# Altium PCB PCB1.PcbDoc
Units mm, origin at the board's own origin, x right, y up, seen from the top; angles counter-clockwise.
Board outline 19 x 53.5 mm, 2 copper layers (Top Layer, Bottom Layer), stack 1.569 mm thick; 20 components, 8 nets, 59 pads, 7 vias.
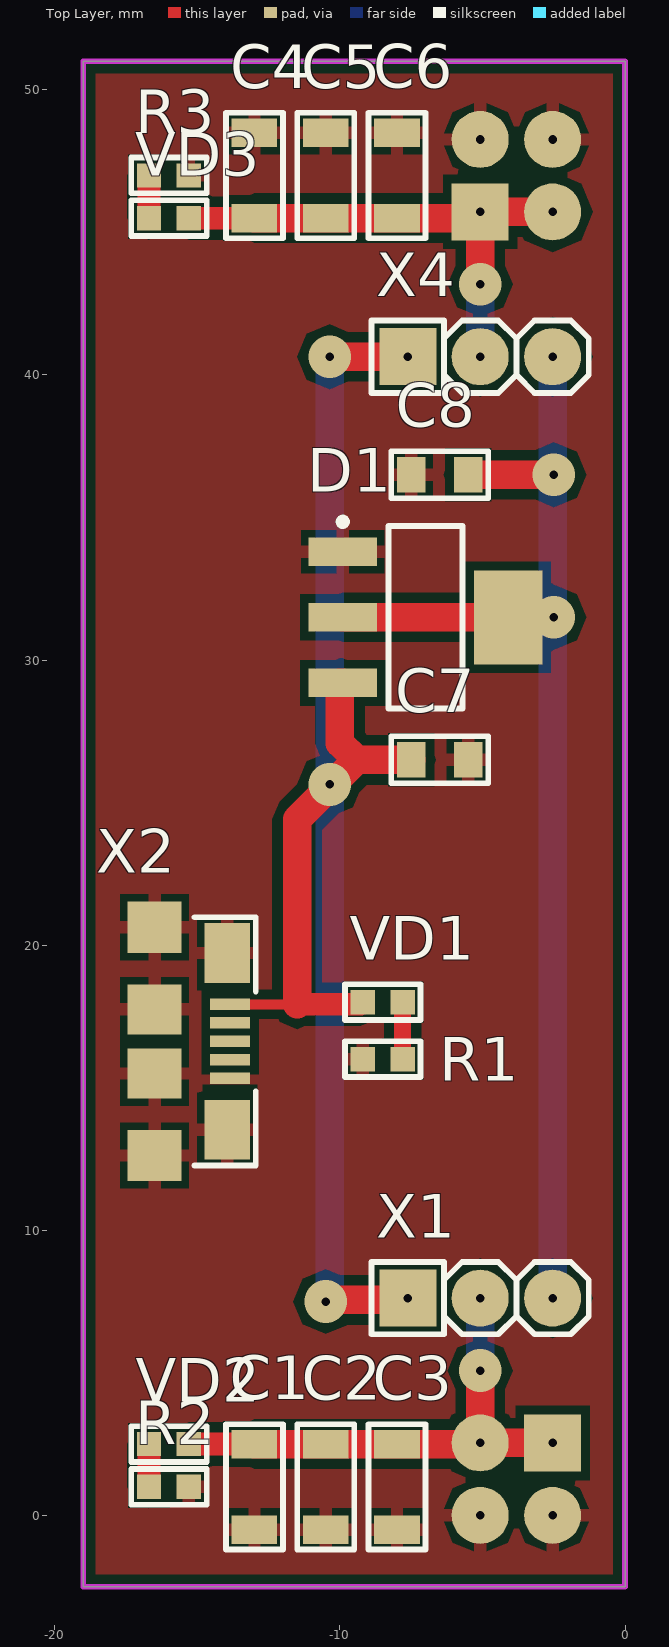
[diagram p0: Top Layer view]
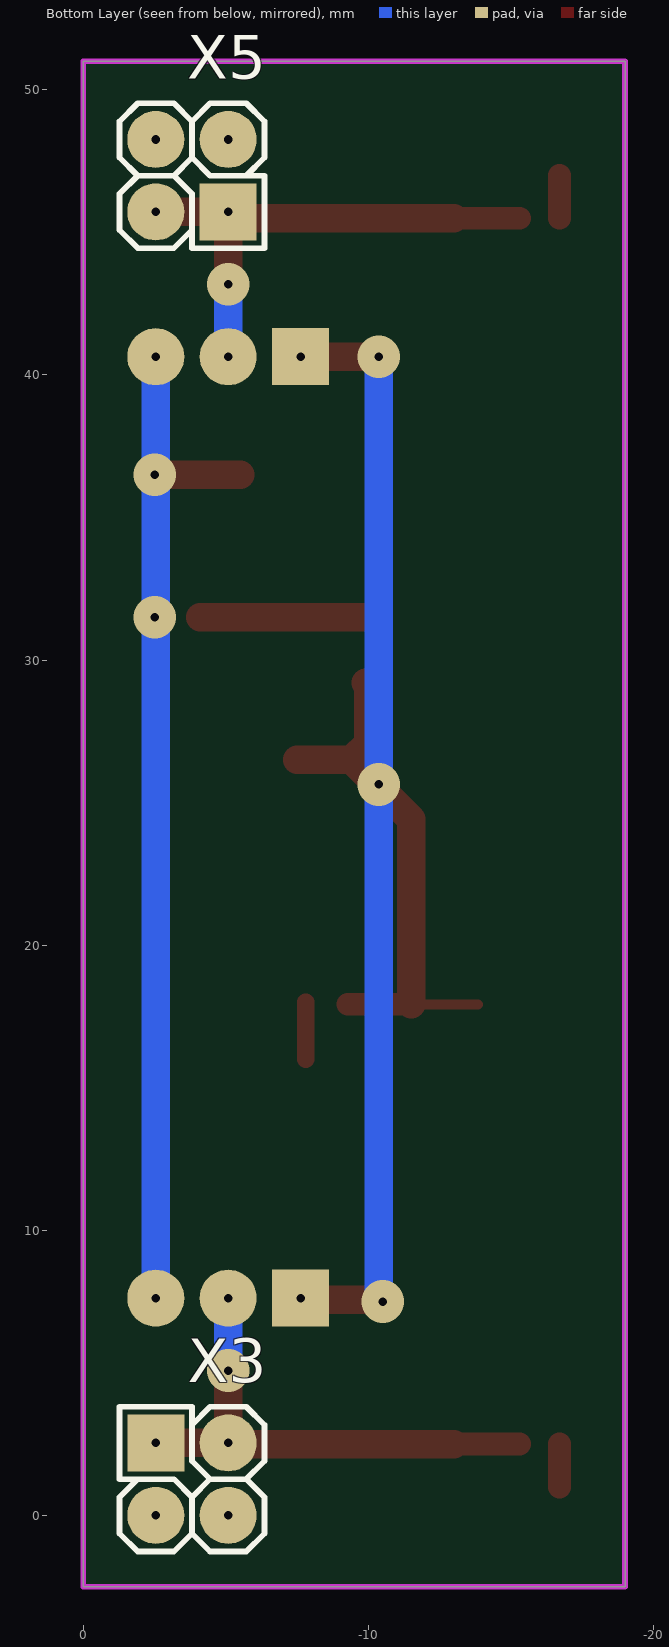
[diagram p1: Bottom Layer view, seen from below]
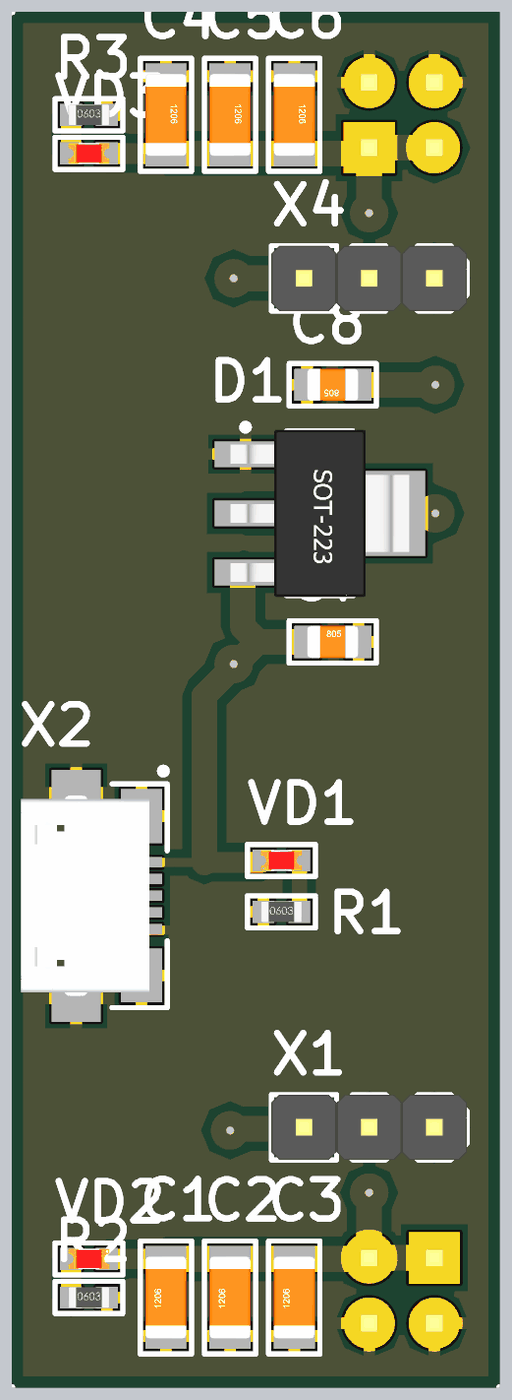
[diagram p2: 3D render of the assembled board from above, using the file's embedded part models]

## Layer stack, top to bottom
Top Solder: solder mask 0.0254, SM-001, Dk 4
Top Layer: signal copper 0.035
Dielectric 1: core 1.4986, Core-043, Dk 4.3
Bottom Layer: signal copper 0.035
Bottom Solder: solder mask 0.0254, SM-001, Dk 4

## Board outline
-19,-2.5 -19,51 0,51 0,-2.5

## Design rules (kind name [scope] priority, off if disabled: settings)
Clearance [All] p1: gap=0.1 ignorepadtopadclearanceinfootprint=TRUE except(0: Arc-Hole Track-Hole SMDPad-Hole THPad-Hole Via-Hole Fill-Hole Poly-Hole Region-Hole Text-Hole; 0.3: Arc-Poly Track-Poly SMDPad-Poly THPad-Poly Via-Poly Fill-Poly Poly-Poly)
PolygonConnect [All] p1: connectstyle=Relief reliefconductorwidth=0.45 reliefentries=4 polygonreliefangle="90 Angle" airgapwidth=0.254
RoutingVias [All] p1: holewidth=0.711 width=1.27 viastyle="Through Hole" minholewidth=0.711 minwidth=1.27 maxholewidth=0.711 maxwidth=1.27
SolderMaskExpansion [All] p1: expansion=0.102 istentingtop=FALSE
Width [All] p1: maxlimit=5 minlimit=0.1 preferedwidth=0.254
30 further rules are at their usual default settings.

## Components (designator, comment, footprint, x,y, rotation, side; value= is the part's Value field where it differs from the comment)
C1 "Ceramic capacitor, 10μF, X7R, ±10%, 50V, 1206, -55...+125°C" "CAP: 1206" -13,1 r90 top value=10μF
C2 "Ceramic capacitor, 10μF, X7R, ±10%, 50V, 1206, -55...+125°C" "CAP: 1206" -10.5,1 r90 top value=10μF
C3 "Ceramic capacitor, 10μF, X7R, ±10%, 50V, 1206, -55...+125°C" "CAP: 1206" -8,1 r90 top value=10μF
C4 "Ceramic capacitor, 10μF, X7R, ±10%, 50V, 1206, -55...+125°C" "CAP: 1206" -13,47 r270 top value=10μF
C5 "Ceramic capacitor, 10μF, X7R, ±10%, 50V, 1206, -55...+125°C" "CAP: 1206" -10.5,47 r270 top value=10μF
C6 "Ceramic capacitor, 10μF, X7R, ±10%, 50V, 1206, -55...+125°C" "CAP: 1206" -8,47 r270 top value=10μF
C7 "Ceramic capacitor, 0.1μF, X7R, ±10%, 16V, 0805, -55...+125°C" "CAP: 0805" -6.5,26.5 r0 top value=0.1μF
C8 "Ceramic capacitor, 0.1μF, X7R, ±10%, 16V, 0805, -55...+125°C" "CAP: 0805" -6.5,36.5 r180 top value=0.1μF
D1 "Linear voltage regulator, input 3.9...18V, 0.6V, output 3.3V, 1.2A, -40...+85°C, SOT223" SOT223 -7,31.5 r0 top
R1 "Resistor film, 100R, ±5%, 0603, 0.1W, -55...+125°C" "RES: 0603" -8.5,16 r0 top value=100R
R2 "Resistor film, 100R, ±5%, 0603, 0.1W, -55...+125°C" "RES: 0603" -16,1 r0 top value=100R
R3 "Resistor film, 100R, ±5%, 0603, 0.1W, -55...+125°C" "RES: 0603" -16,47 r0 top value=100R
VD1 "LED, Green, *, *, *, -55...+150°C" "LED: 0603R" -8.5,18 r0 top
VD2 "LED, Green, *, *, *, -55...+150°C" "LED: 0603R" -16,2.5 r180 top
VD3 "LED, Green, *, *, *, -55...+150°C" "LED: 0603R" -16,45.5 r180 top
X1 "Connector, 3pin, 2.54mm, 500VAC, 3A" "CON: PLS-3" -5.08,7.62 r0 top
X2 "USB micro B" "CON: USB micro-A (ZX62-B-5PA)" -13.85,16.625 r270 top
X3 "Connector, 6pin, 2.54mm, 500VAC, 3A" "CON: PLD-4" -3.81,1.27 r270 bottom
X4 "Connector, 3pin, 2.54mm, 500VAC, 3A" "CON: PLS-3" -5.08,40.64 r0 top
X5 "Connector, 6pin, 2.54mm, 500VAC, 3A" "CON: PLD-4" -3.81,46.99 r90 bottom

## Footprints (in the part's own frame and the unit in brackets; to place one, negate y for a bottom-side part, rotate by r counter-clockwise, add the part's x,y. Pads: shape width x height; smd on the part's side, far side on the other; paste and mask are expansions set on the pad)
"CAP: 0805" [mm]
  rect 1x1.25 smd: 1(-1,0) 2(1,0)
  silkscreen extent -1.7,-0.82 1.7,0.82, body extent -1,-0.62 1,0.63, height 0.78
"CAP: 1206" [mm]
  rect 1x1.6 smd: 1(-1.5,0) 2(1.5,0)
  silkscreen extent -2.2,-1 2.2,1, body extent -1.6,-0.8 1.6,0.8, height 1
"CON: PLD-4" [mm]
  rect 2x2 hole 0.3: 1(-1.27,-1.27)
  round 2 hole 0.3: 2(-1.27,1.27) 3(1.27,-1.27) 4(1.27,1.27)
  silkscreen extent -2.54,-2.54 2.54,2.54, body extent -2.59,-2.55 2.49,2.53, height 8.54
"CON: PLS-3" [mm]
  rect 2x2 hole 0.3: 1(-2.54,0)
  round 2 hole 0.3: 2(0,0) 3(2.54,0)
  silkscreen extent -3.81,-1.27 3.81,1.27, body extent -3.81,-1.27 3.81,1.27, height 8.54
"CON: USB micro-A (ZX62-B-5PA)" [mm]
  rect 1.8x1.9 smd: 0(-4,-2.65) 0(4,-2.65)
  rect 2.1x1.6 smd: 0(-3.1,-0.1) 0(3.1,-0.1)
  rect 1.75x1.9 smd: 0(-1.125,-2.65) 0(1.125,-2.65)
  rect 0.4x1.4 smd: 1(-1.3,0) 2(-0.65,0) 3(0,0) 4(0.65,0) 5(1.3,0)
  round 0.5 on Top Overlay: ""(-4.85,0.75)
  silkscreen extent -4.35,-1.25 4.35,0.9, body extent -3.9,-4.8 3.9,0.2, height 2.68
"LED: 0603R" [mm]
  rect 0.85x0.85 smd: 1(-0.7,0) 2(0.7,0)
  silkscreen extent -1.33,-0.63 1.33,0.63, body extent -0.8,-0.4 0.8,0.4, height 0.6
"RES: 0603" [mm]
  rect 0.85x0.85 smd: 1(-0.7,0) 2(0.7,0)
  silkscreen extent -1.33,-0.63 1.33,0.63, body extent -0.8,-0.4 0.8,0.4, height 0.44
SOT223 [mm] "SOT223, 4-Leads, Body 6,50x7,00mm (avg), Pitch 2,30mm, IPC Medium Density"
  rect 2.4x1 smd: 1(-2.9,2.3) 2(-2.9,0) 3(-2.9,-2.3)
  rect 2.4x3.3 smd: 4(2.9,0)
  round 0.5 on Mech1: ""(-3,2.7)
  silkscreen extent -3.02,-3.2 1.3,3.47, body extent -3.48,-3.25 3.48,3.25, height 1.65

## Part data
C1 C2 C3 C4 C5 C6: library part Ceramic_1206, Manufacturer=Yageo, Package=1206, PartNumber=CC1206KRX7R9BB104, Temperature=-55...+125°C, Tolerance=±10%, TypeCapacitor="Ceramic capacitor", TypeDielectric=X7R, Voltage=50V, HelpURL=https://www.digikey.com/product-detail/en/yageo/CC1206KRX7R9BB104/311-1179-1-ND/303089, ValueManufacturerPartNumber="Ceramic capacitor, 10μF, X7R, ±10%, 50V, 1206, -55...+125°C"
C7 C8: library part Ceramic_0805, Manufacturer=Yageo, Package=0805, PartNumber=CC0805KRX7R7BB104, Temperature=-55...+125°C, Tolerance=±10%, TypeCapacitor="Ceramic capacitor", TypeDielectric=X7R, Voltage=16V, HelpURL=https://www.digikey.com/product-detail/en/yageo/CC0805KRX7R7BB104/311-1142-1-ND/303052, ValueManufacturerPartNumber="Ceramic capacitor, 0.1μF, X7R, ±10%, 16V, 0805, -55...+125°C"
D1: library part LDL1117S33R, "Linear voltage regulator", CurrentOutput=1.2A, Manufacturer=STMicroelectronics, Package=SOT223, Temperature=-40...+85°C, VoltageInput="input 3.9...18V", VoltageOutput="output 3.3V", ComponentType="Linear voltage regulator", HelpURL=https://www.digikey.com/product-detail/en/stmicroelectronics/LDL1117S33R/497-17239-1-ND/7102079, MaxDropout=0.6V, PartNumber=LDL1117S33R, ValueManufacturerPartNumber="Linear voltage regulator, input 3.9...18V, 0.6V, output 3.3V, 1.2A, -40...+85°C, SOT223"
R1 R2 R3: library part Resistor_0603, Manufacturer=Yageo, Package=0603, PartNumber=RC0603JR-07100RL, Power=0.1W, Temperature=-55...+125°C, Tolerance=±5%, TypeResistor="Resistor film", HelpURL=https://www.digikey.com/product-detail/en/yageo/RC0603JR-07100RL/311-100GRCT-ND/729644, ValueManufacturerPartNumber="Resistor film, 100R, ±5%, 0603, 0.1W, -55...+125°C"
VD1 VD2 VD3: library part LED_single, Color=GREEN, ColorParameter=Green, Temperature=-55...+150°C, TypeDiode=LED, ValueManufacturerPartNumber="LED, Green, *, *, *, -55...+150°C"
X1 X4: library part PLS-3, CurrentMax=3A, Manufacturer=Connfly, VoltageMax=500VAC, CommentText="\"Разъем\"", HelpURL=https://www.chipdip.ru/product/pls-3, Multichannel=3pin, PartNumber=PLS-3, Pitch=2.54mm, TypeConnector=Connector, ValueManufacturerPartNumber="Connector, 3pin, 2.54mm, 500VAC, 3A"
X2: library part Connector_USB_micro_B, Manufacturer="Hirose Electric", PartNumber=ZX62-B-5PA, CommentText="\"USB\"", HelpURL=https://www.digikey.com/product-detail/en/hirose-electric-co-ltd/ZX62-B-5PA/H11579CT-ND/1851090, TypeConnector="USB micro B", ValueManufacturerPartNumber="USB micro B"
X3 X5: library part PLD-4, CurrentMax=3A, Manufacturer=Connfly, VoltageMax=500VAC, CommentText="\"Разъем\"", HelpURL=https://www.chipdip.ru/product/pld-6, Multichannel=6pin, PartNumber=PLD-4, Pitch=2.54mm, TypeConnector=Connector, ValueManufacturerPartNumber="Connector, 6pin, 2.54mm, 500VAC, 3A"

## Via types
v1: diameter 1.5, hole 0.3, Top Layer to Bottom Layer, tented both sides, 7 vias

## Nets (pads, with @x,y where several pads share a name; then routed paths per layer and width w, separated by ;. In a path a pad name is that pad's centre, name@x,y a point inside that pad or via, vN(x,y) a via of type N, cw(c..) or ccw(c..) an arc to the next point about the centre after c; other vN are vias at no path point)
+3.3: C8.1 D1.2 D1.4 X1.3 X4.3 | length 41.8
  Top Layer w1: D1.2 D1.4 ; C8.1 v1(-2.5,36.5)
  Bottom Layer w1: X1.3 X4.3
  other v1: -2.5,31.5
GND: C1.1 C2.1 C3.1 C4.1 C5.1 C6.1 C7.2 C8.2 D1.1 R1.1 R2.2 R3.2 X2.0 X2.5 X3.3 X3.4 X5.3 X5.4
NetC1_2: C1.2 C2.2 C3.2 VD2.1 X1.2 X3.1 X3.2 | length 17.9
  Top Layer w0.8: VD2.1 C1.2
  Top Layer w1: C1.2 C2.2 C3.2 -5.12,2.5 X3.2 ; v1(-5.08,5.08) X3.2 ; X3.1 X3.2
  Bottom Layer w1: v1(-5.08,5.08) X1.2
NetC4_2: C4.2 C5.2 C6.2 VD3.1 X4.2 X5.1 X5.2 | length 17.9
  Top Layer w0.8: VD3.1 C4.2
  Top Layer w1: C4.2 C5.2 C6.2 -5.3,45.5 X5.1 ; v1(-5.08,43.18) X5.1 ; X5.2 X5.1
  Bottom Layer w1: X4.2 v1(-5.08,43.18)
NetR1_2: R1.2 VD1.2 | length 2
  Top Layer w0.6: R1.2 VD1.2
NetR2_1: R2.1 VD2.2 | length 1.5
  Top Layer w0.8: R2.1 VD2.2
NetR3_1: R3.1 VD3.2 | length 1.5
  Top Layer w0.8: VD3.2 R3.1
VCC: C7.1 D1.3 VD1.1 X1.1 X2.1 X4.1 | length 57.7
  Top Layer w0.35: X2.1 -11.5,17.925 ; VD1.1@-9.275,17.925 VD1.1
  Top Layer w0.8: -11.5,17.925 VD1.1@-9.275,17.925
  Top Layer w1: -11.5,17.925 -11.5,24.414 -9.414,26.5 ; v1(-10.5,7.5) -10.44,7.56 -7.68,7.56 X1.1 ; v1(-10.36,40.64) X4.1 ; D1.3 -10,29.2 -10,27.086 -9.414,26.5 ; C7.1 -9.414,26.5
  Bottom Layer w1: v1@-10.36,7.64 v1(-10.36,25.64) v1(-10.36,40.64)
pads on no net: D1. X2. X2.2 X2.3 X2.4

## Polygon pours and split planes (outlines as drawn)
GND on Top Layer "GND_TOP_2" (solid, pour order 0): -19,-2.5 0,-2.5 0,51 -19,51

## Keep-outs
Keep-Out Layer:
  lines w0.2: -19,-2.5 -2,-2.5 0,-2.5 0,51 -19,51 -19,-2.5

## Dimensions
-19,-2.5 to -19,51 on Top Overlay
-19,-2.5 to 0,-2.5 on Top Overlay